# EAGLE board LOCO-Single Light (EAGLE 9.7.0)
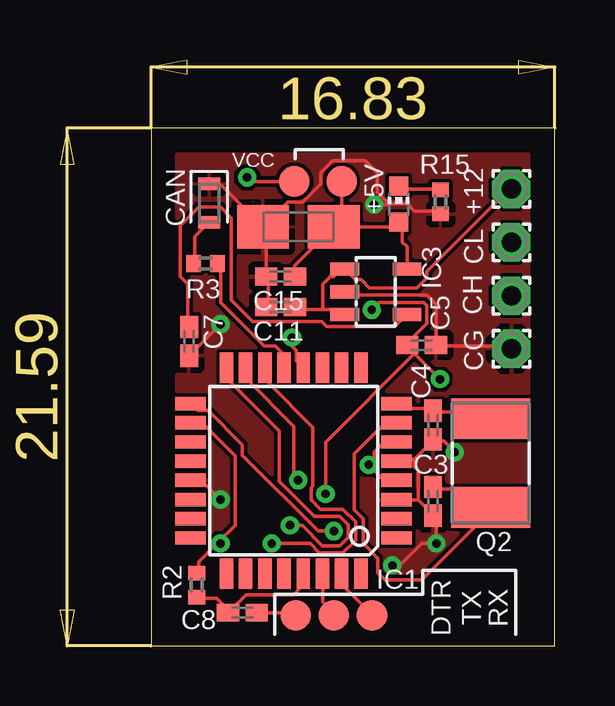
[diagram p0: board, top side]
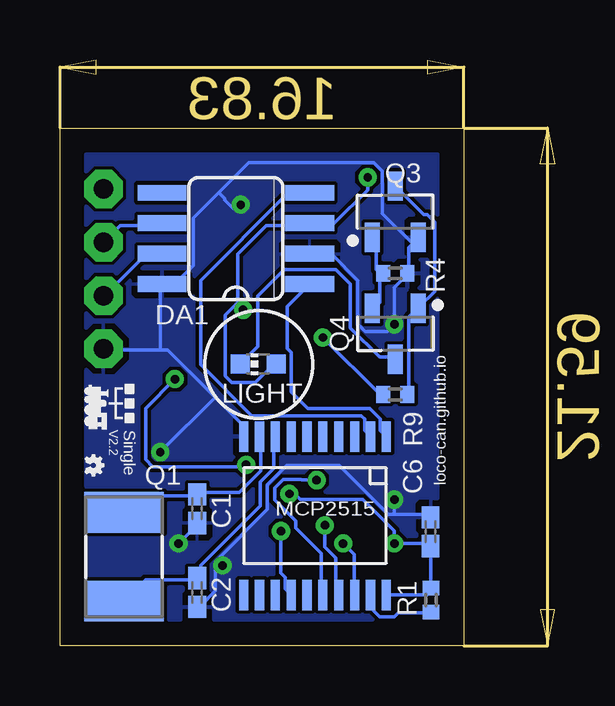
[diagram p1: board, bottom side, seen from below]

Size 16.83 x 21.59 mm. Coordinates in mm from the lower left corner, seen from the top.
Outline: 16.83,21.59 0,21.59 0,0 16.83,0 16.83,21.59
Copper layers (1*16): Top / Bottom
Stack-up Default Layer Stack: Top User Defined 0.035mm / Dielectric-1 User Defined 1.5mm / Bottom User Defined 0.035mm
Design rules "default": minimum track width 6mil, minimum drill 0.35mm, track to track 6mil, track to pad 6mil, pad to pad 6mil, via to via 6mil, smd to smd 6mil, copper to edge 40mil, drill to drill 6mil, minimum pad ring 10mil, minimum via ring 8mil, stop-mask expansion 4mil, vias tented up to drill 0mil, thermal gap 10mil

## Footprints (pad centres in the part's own frame; a part is rotated, then mirrored left to right if it is on the bottom)
B1,27 = smd 1.27 x 1.27: TP 0,0
CHIP-LED0603 = smd 0.8 x 0.8: A 0,-0.75; C 0,0.75
1,6/0,8 = drill 0.813 pad 1.6 octagon: 1 0,0
C0402K = smd 0.925 x 0.74: 1 -0.6,0; 2 0.6,0
A/3216-18W = smd 2.15 x 1.8: + 1.475,0; - -1.475,0
LEDC1608X39N_B = smd 0.512 x 0.912: 1 -0.8,0; 2 0.8,0
SO08 = smd 0.66 x 2.032: 1 -1.905,-3.073; 2 -0.635,-3.073; 3 0.635,-3.073; 4 1.905,-3.073; 5 1.905,3.073; 6 0.635,3.073; 7 -0.635,3.073; 8 -1.905,3.073
TQFP32-08 = smd 1.27 x 0.559: 1 -4.293,2.8; 2 -4.293,2; 3 -4.293,1.2; 4 -4.293,0.4; 5 -4.293,-0.4; 6 -4.293,-1.2; 7 -4.293,-2; 8 -4.293,-2.8; 17 4.293,-2.8; 18 4.293,-2; 19 4.293,-1.2; 20 4.293,-0.4; 21 4.293,0.4; 22 4.293,1.2; 23 4.293,2; 24 4.293,2.8 | smd 0.559 x 1.27: 9 -2.8,-4.293; 10 -2,-4.293; 11 -1.2,-4.293; 12 -0.4,-4.293; 13 0.4,-4.293; 14 1.2,-4.293; 15 2,-4.293; 16 2.8,-4.293; 25 2.8,4.293; 26 2,4.293; 27 1.2,4.293; 28 0.4,4.293; 29 -0.4,4.293; 30 -1.2,4.293; 31 -2,4.293; 32 -2.8,4.293
TSSOP20 = smd 1.27 x 0.381: 1 -3.302,2.642; 2 -3.302,1.981; 3 -3.302,1.321; 4 -3.302,0.66; 5 -3.302,0; 6 -3.302,-0.66; 7 -3.302,-1.321; 8 -3.302,-1.981; 9 -3.302,-2.642; 10 -3.302,-3.302; 11 3.302,-3.302; 12 3.302,-2.642; 13 3.302,-1.981; 14 3.302,-1.321; 15 3.302,-0.66; 16 3.302,0; 17 3.302,0.66; 18 3.302,1.321; 19 3.302,1.981; 20 3.302,2.642
SOT23-5 = smd 0.55 x 1.2: 1 -0.95,-1.3; 2 0,-1.3; 3 0.95,-1.3; 4 0.95,1.3; 5 -0.95,1.3
5.0X3.2_2 = smd 1.7 x 3.3: 1 -1.85,0; 2 1.85,0
SOT95P237X112-3N = smd 1.224 x 0.625: 1 -1.064,0.95; 2 -1.064,-0.95; 3 1.064,0
R0402 = smd 0.6 x 0.7: 1 -0.5,0; 2 0.5,0

## Placement (x,y rotation side)
5V  PTR1B1,27  [B1,27]  7.94,19.37 0 top
+5V  [CHIP-LED0603]  10.32,18.41 0 top
+12  [1,6/0,8]  15.01,19.05 90 top
C1  22p  [C0402K]  11.11,5.71 270 bottom
C2  22p  [C0402K]  11.11,2.22 270 bottom
C3  22p  [C0402K]  11.75,6.03 270 top
C4  22p  [C0402K]  11.75,9.21 270 top
C5  100n  [C0402K]  11.27,12.54 180 top
C6  100n  [C0402K]  1.39,4.76 90 bottom
C7  470pF  [C0402K]  1.59,12.7 90 top
C8  100n  [C0402K]  3.81,1.39 180 top
C11  100n  [C0402K]  5.4,14.13 0 top
C15  100n  [C0402K]  5.4,15.4 0 top
C16  16uF  [A/3216-18W]  6.14,17.47 0 top
CAN  CAN  [LEDC1608X39N_B]  2.42,18.46 270 top
CG  [1,6/0,8]  15.01,12.38 90 top
CH  [1,6/0,8]  15.01,14.61 90 top
CL  [1,6/0,8]  15.01,16.83 90 top
DA1  TJA1050  [SO08]  9.5,16.99 90 bottom
DTR  PTR1B1,27  [B1,27]  6.03,1.27 180 top
IC1  Atmega 328-P  [TQFP32-08]  5.94,7.3 180 top
IC2  MCP2515  [TSSOP20]  5.87,5.43 270 bottom
IC3  MIC5219BM5  [SOT23-5]  9.37,14.76 270 top
LIGHT  [CHIP-LED0603]  8.57,11.75 90 bottom
Q1  8MHz  [5.0X3.2_2]  14.16,3.72 270 bottom
Q2  16MHz  [5.0X3.2_2]  14.16,7.62 90 top
Q3  NPN  [SOT95P237X112-3N]  2.86,18.1 90 bottom
Q4  NPN  [SOT95P237X112-3N]  2.86,13.02 270 bottom
R1  10k  [R0402]  1.37,1.91 90 bottom
R2  10k  [R0402]  1.91,2.54 90 top
R3  220R  [R0402]  2.27,15.94 180 top
R4  33  [R0402]  2.86,15.54 0 bottom
R9  10k  [R0402]  2.86,10.48 180 bottom
R15  220R  [R0402]  12.06,18.51 90 top
RX  PTR1B1,27  [B1,27]  9.21,1.27 180 top
TX  PTR1B1,27  [B1,27]  7.62,1.27 180 top
VCC  PTR1B1,27  [B1,27]  5.97,19.37 0 top

## Library data of the parts
5V DTR RX TX VCC = testpad
+5V LIGHT = led
+12 CG CH CL = wirepad
C1-C8 C11 C15 C16 = rcl; SPICEPREFIX: C
CAN = Opto-Electronic; CATEGORY: Opto-Electronic; COLOR: Blue; SUB-CATEGORY: LED
DA1 = TJA1050
IC1 = atmel; MPN: ATMEGA8-16AU; OC_FARNELL: 9171371; OC_NEWARK: 73M8863
IC2 = mcp2514
IC3 = v-reg-micrel; MF: ALTERA CORPORATION; MPN: MIC5219BM5 TR; OC_FARNELL: 1100656; OC_NEWARK: 09J8939
Q1 Q2 = crystal-geyer_V1_0
Q3 Q4 = Transistor; CATEGORY: Transistor; SUB-CATEGORY: BJT; TYPE: NPN
R1-R4 R9 R15 = rcl; SPICEPREFIX: R

## Nets
+5V: 5V.TP +5V.A C15.2 C16.+ IC3.5
+12V: +12.1 C11.2 IC3.1 IC3.3
A0: IC1.23
A1: IC1.24
A2: IC1.25
A3: IC1.26
A4: IC1.27
A5: IC1.28
CAN-H: CH.1 DA1.7
CAN-L: CL.1 DA1.6
CAN-OCC1: C1.1 IC2.9 Q1.1
CAN-OCC2: C2.1 IC2.8 Q1.2
CS: IC1.14 IC2.18
D2: IC1.32
D3: IC1.1
D4: IC1.2
D5: IC1.9
D6: IC1.10
D7: IC1.11
D8: IC1.12 R9.2
D9: IC1.13 R3.1
DTR: C8.1 DTR.TP
GND: C1.2 C2.2 C3.2 C4.2 C5.1 C6.2 C7.1 C11.1 C15.1 C16.- CAN.1 CG.1 DA1.2 DA1.8 IC1.3 IC1.5 IC1.21 IC2.10 IC3.2 Q3.2 R4.2 R15.1
N$1: C7.2 IC3.4
N$3: CAN.2 R3.2
N$4: Q3.1 Q4.2 R4.1
N$5: Q3.3 Q4.1 R9.1
N$6: IC2.19 R1.1
N$7: LIGHT.C Q4.3
N$10: C3.1 IC1.7 Q2.1
N$11: C4.1 IC1.8 Q2.2
N$12: +5V.C R15.2
N$15: C8.2 IC1.29 R2.1
RX: IC1.31 RX.TP
RXCAN: DA1.4 IC2.2
SCK: IC1.17 IC2.14
SI: IC1.16 IC2.17
SO: IC1.15 IC2.16
TX: IC1.30 TX.TP
TXCAN: DA1.1 IC2.1
VCC: C5.2 C6.1 DA1.3 IC1.4 IC1.6 IC1.18 IC2.20 LIGHT.A R1.2 R2.2 VCC.TP

## Tracks (layer width: path | path; a pad name or v marks a point on that pad's centre or on a via)
+5V
  Top 0.152: 5V.TP 7.94,17.79 C16.+ | C15.2 6,15.85 C16.+ | C16.+ 10.12,17.47 +5V.A 10.48,17.51 10.48,16.83 10.67,16.64 IC3.5
+12V
  Top 0.152: 7.16,14.02 7.77,14.02 7.92,13.87 IC3.3 | 7.16,14.02 6.1,14.02 C11.2 | 7.16,14.02 7.16,15.09 7.47,15.39 7.62,15.39 7.92,15.7 IC3.1 8.51,15.27 8.76,15.27 9.1,14.93 11.08,14.93 11.49,15.34 11.49,15.61 14.94,19.05 +12.1
CAN-H
  Bottom 0.152: DA1.7 12.65,16.31 13.26,16.31 14.94,14.63 CH.1
CAN-L
  Bottom 0.152: DA1.6 12.65,17.53 14.33,17.53 14.94,16.92 CL.1
CAN-OCC1
  Bottom 0.152: Q1.1 14.02,5.64 13.41,6.25 11.12,6.25 C1.1 10.97,6.4 9.36,6.4 8.46,7.3 8.46,8.68 IC2.9
CAN-OCC2
  Bottom 0.152: Q1.2 14.02,1.98 13.26,2.74 11.12,2.74 C2.1 10.97,2.9 10.97,3.35 8.49,5.84 8.49,6.84 7.92,7.4 7.92,8.66 IC2.8
CS  (via drill 0.35)
  Top 0.152: IC1.14 4.88,11.58 4.88,10.97 6.74,9.11 6.74,6.66 6.67,6.59 6.67,6.08 7.05,5.7 8,5.7 8.53,5.16 8.53,4.41 8,3.87 7.02,3.87 6.62,4.27 v5.03,4.27
  Bottom 0.152: v5.03,4.27 4.57,3.81 4.57,2.13 IC2.18
D8  (via drill 0.35)
  Top 0.152: IC1.12 6.05,11.89 6.05,12.32 5.87,12.5 v5.87,12.86
  Bottom 0.152: v5.87,12.86 3.49,10.48 R9.2
D9
  Top 0.152: R3.1 2.9,15.85 2.9,14.33 4.72,12.5 5.18,12.5 5.49,12.19 5.49,11.73 IC1.13
DTR
  Top 0.152: C8.1 4.42,1.37 5.94,1.37 DTR.TP
GND  (via drill 0.35)
  Top 0.152: 10.97,7.77 11.73,8.53 C4.2 11.89,8.53 12.19,8.53 v12.65,8.08 | 10.97,7.77 10.36,7.77 IC1.5 | 11.12,6.1 10.36,6.1 IC1.3 | 11.12,6.1 11.73,5.49 C3.2 11.89,5.33 v11.89,4.27 11.28,4.27 10.36,3.35 v10.06,3.35 | 10.97,7.77 10.97,7.47 11.12,7.32 11.12,6.1 | v2.9,6.1 2.13,6.86 1.68,6.86 IC1.21 | C11.1 4.88,14.17 4.88,15.37 C15.1 4.8,16.67 4.45,17.55 4.49,17.59 C16.- | 9.91,18.44 10.67,18.44 10.97,18.14 12.04,18.14 R15.1 | v2.9,13.41 1.68,12.19 C7.1 | CG.1 14.94,12.5 11.89,12.5 C5.1 11.89,12.65 11.89,14.22 11.49,14.62 8.21,14.62 IC3.2 | 9.91,18.44 9.44,18.91 9.44,19.73 8.93,20.23 7.58,20.23 7.07,19.73 7.07,19.25 6.33,18.5 5.7,18.5 C16.- | 9.91,18.44 9.86,18.39 v9.3,18.39 | CAN.1 2.48,19.2 2.93,19.2 C16.-
  Bottom 0.152: v11.89,4.27 11.12,5.03 C1.2 | 2.9,5.49 1.52,5.49 C6.2 | 10.36,3.35 10.36,2.29 10.97,1.68 C2.2 | 10.36,3.35 10.36,3.5 8.18,5.68 8.18,6.71 7.38,7.52 5.19,7.52 3.16,5.49 2.9,5.49 | 2.9,5.49 v2.9,6.1 | 10.36,3.35 v10.06,3.35 | 2.13,16.76 1.98,16.92 Q3.2 2.13,16.76 | 2.13,16.76 2.29,16.61 2.29,15.54 R4.2 2.44,15.39 2.9,14.94 v2.9,13.41 3.2,13.11 4.12,13.11 4.42,13.41 4.42,15.24 5.49,16.31 6.4,16.31 DA1.2 | 10.36,10.36 12.34,12.34 12.65,12.34 | 10.36,10.36 9.3,9.3 9.3,8.84 IC2.10 | 12.65,12.34 14.94,12.34 CG.1 | 12.65,12.34 12.65,14.94 DA1.8 12.5,15.09 12.04,15.09 11.28,15.85 11.28,17.83 10.21,18.9 | 10.36,10.36 v12.65,8.08 | 10.21,18.9 9.97,18.66 9.97,18.58 9.62,18.22 9.47,18.22 v9.3,18.39 | 2.13,16.76 3.4,18.03 3.4,19.79 3.75,20.14 8.97,20.14 10.21,18.9
  pour Bottom: 0,21.59 16.83,21.59 16.83,0 0,0
  pour Top: 0,21.59 16.83,21.59 16.83,0 0,0
N$1
  Top 0.152: C7.2 1.52,13.41 1.52,15.09 1.22,15.39 1.22,17.53 1.98,18.29 2.9,18.29 3.35,17.83 3.35,14.42 4.24,13.53 7.11,13.53 7.33,13.31 10.16,13.31 IC3.4
N$3
  Top 0.152: R3.2 1.83,16 1.83,17.07 2.29,17.53 CAN.2
N$4
  Bottom 0.152: Q4.2 3.66,14.17 3.5,14.33 3.5,15.39 R4.1 3.5,15.54 3.66,15.7 3.66,16.92 Q3.1
N$5
  Bottom 0.152: R9.1 2.29,10.52 2.29,13.72 1.98,14.02 Q4.1 1.83,14.17 1.22,14.78 1.22,17.68 1.52,17.98 1.68,17.98 2.74,19.05 Q3.3
N$6
  Bottom 0.152: R1.1 1.37,1.37 2.74,1.37 2.9,1.22 3.5,1.22 3.81,1.52 3.81,1.98 IC2.19
N$7
  Bottom 0.152: Q4.3 2.9,12.04 3.5,12.04 4.72,13.26 4.72,15.09 5.33,15.7 7.48,15.7 8.59,14.59 8.59,12.48 LIGHT.C
N$10
  Top 0.152: C3.1 11.89,6.55 13.26,6.55 14.02,5.79 Q2.1 14.17,5.64 11.28,2.74 9.75,2.74 9.45,3.05 9.45,3.66 8.84,4.27 8.84,5.29 8.46,5.66 8.46,8.01 9.75,9.3 10.21,9.3 IC1.7
N$11
  Top 0.152: IC1.8 10.36,10.06 10.52,9.91 11.73,9.91 C4.1 11.89,9.75 13.87,9.75 14.02,9.6 Q2.2
N$12
  Top 0.152: R15.2 12.04,19.05 10.36,19.05 +5V.C
N$15
  Top 0.152: R2.1 1.98,1.98 2.74,1.98 3.2,1.52 C8.2 3.35,1.52 3.96,2.13 5.94,2.13 6.25,2.44 6.25,2.9 IC1.29
RX
  Top 0.152: IC1.31 8.08,2.9 8.08,2.44 9.14,1.37 RX.TP
RXCAN
  Bottom 0.152: DA1.4 6.55,18.75 7.47,18.75 10.97,15.24 10.97,11.73 8.83,9.6 4.27,9.6 4.13,9.46 4.13,8.97 IC2.2
SCK  (via drill 0.35)
  Top 0.152: IC1.17 1.94,9.81 2.38,9.81 3.81,8.38 3.81,7.94 6.97,4.79 v7.62,4.79
  Bottom 0.152: IC2.14 7.44,2.37 7.44,2.86 7.62,3.04 v7.62,4.79
SI  (via drill 0.35)
  Top 0.152: IC1.16 3.2,11.58 3.2,11.1 5.34,8.96 5.34,6.85 6.79,5.39 7.87,5.39 8.23,5.04 8.23,4.53 7.87,4.18 7.14,4.18 6.29,5.03 v5.79,5.03
  Bottom 0.152: IC2.17 5.33,2.13 5.33,3.68 5.79,4.13 v5.79,5.03
SO  (via drill 0.35)
  Top 0.152: IC1.15 3.96,11.58 3.96,11.14 5.94,9.16 5.94,7.1 v6.13,6.91
  Bottom 0.152: IC2.16 5.94,2.13 5.94,3.85 7.01,4.92 7.01,5.22 7.88,6.08 7.88,6.59 7.52,6.94 6.79,6.94 6.76,6.91 v6.13,6.91
TX
  Top 0.152: IC1.30 7.16,2.9 7.16,1.83 7.62,1.37 TX.TP
TXCAN
  Bottom 0.152: IC2.1 3.47,8.97 3.47,9.46 3.91,9.9 6.51,9.9 7.19,10.59 7.19,12.24 7.35,12.4 7.35,14.15 DA1.1
VCC  (via drill 0.35)
  Top 0.152: 2.74,4.27 3.5,5.03 3.5,7.92 2.13,9.3 1.68,9.3 IC1.18 | 2.74,4.27 1.98,3.5 1.98,3.05 R2.2 | 2.74,4.27 v2.9,4.27 | 9.3,7.47 9.3,8.08 9.6,8.38 10.21,8.38 IC1.6 | 9.3,7.47 9.3,7.32 9.6,7.01 10.21,7.01 IC1.4 | 10.97,12.19 10.67,12.5 C5.2 | 10.97,12.19 v12.04,11.12 | 10.97,12.19 C5.2 | v9.07,7.55 9.15,7.47 9.3,7.47 | 10.97,12.19 7.27,8.49 v7.27,6.33 | C5.2 10.67,12.62 11.49,13.44 11.49,14.18 11.36,14.32 9.5,14.32 v9.2,14.02 | VCC.TP 4.17,19.37 v4,19.53
  Bottom 0.152: 9.42,14.4 9.42,16.33 8.23,17.53 6.55,17.53 DA1.3 5.39,17.62 4,19.01 v4,19.53 | LIGHT.A 7.92,11.73 8.69,10.97 9.67,10.97 9.95,11.25 9.95,13.8 9.42,14.32 9.42,14.4 | IC2.20 3.2,2.13 1.52,2.13 1.37,2.29 R1.2 1.37,2.44 1.37,4.12 C6.1 1.52,4.27 v2.9,4.27 2.9,4.79 4.22,6.12 6.82,6.12 7.04,6.33 v7.27,6.33 | v12.04,11.12 13.26,9.91 13.26,7.77 12.96,7.47 9.15,7.47 v9.07,7.55 | 9.42,14.4 9.2,14.17 v9.2,14.02

## Text on the board
bNames: loco-can.github.io | Single | V2.2